# Altium PCB PCB1.PcbDoc
Units mil, origin at the board's own origin, x right, y up, seen from the top; angles counter-clockwise.
Board outline 2756.19 x 2794.09 mil, 2 copper layers (Top Layer, Bottom Layer); 70 components, 41 nets, 180 pads, 117 vias.
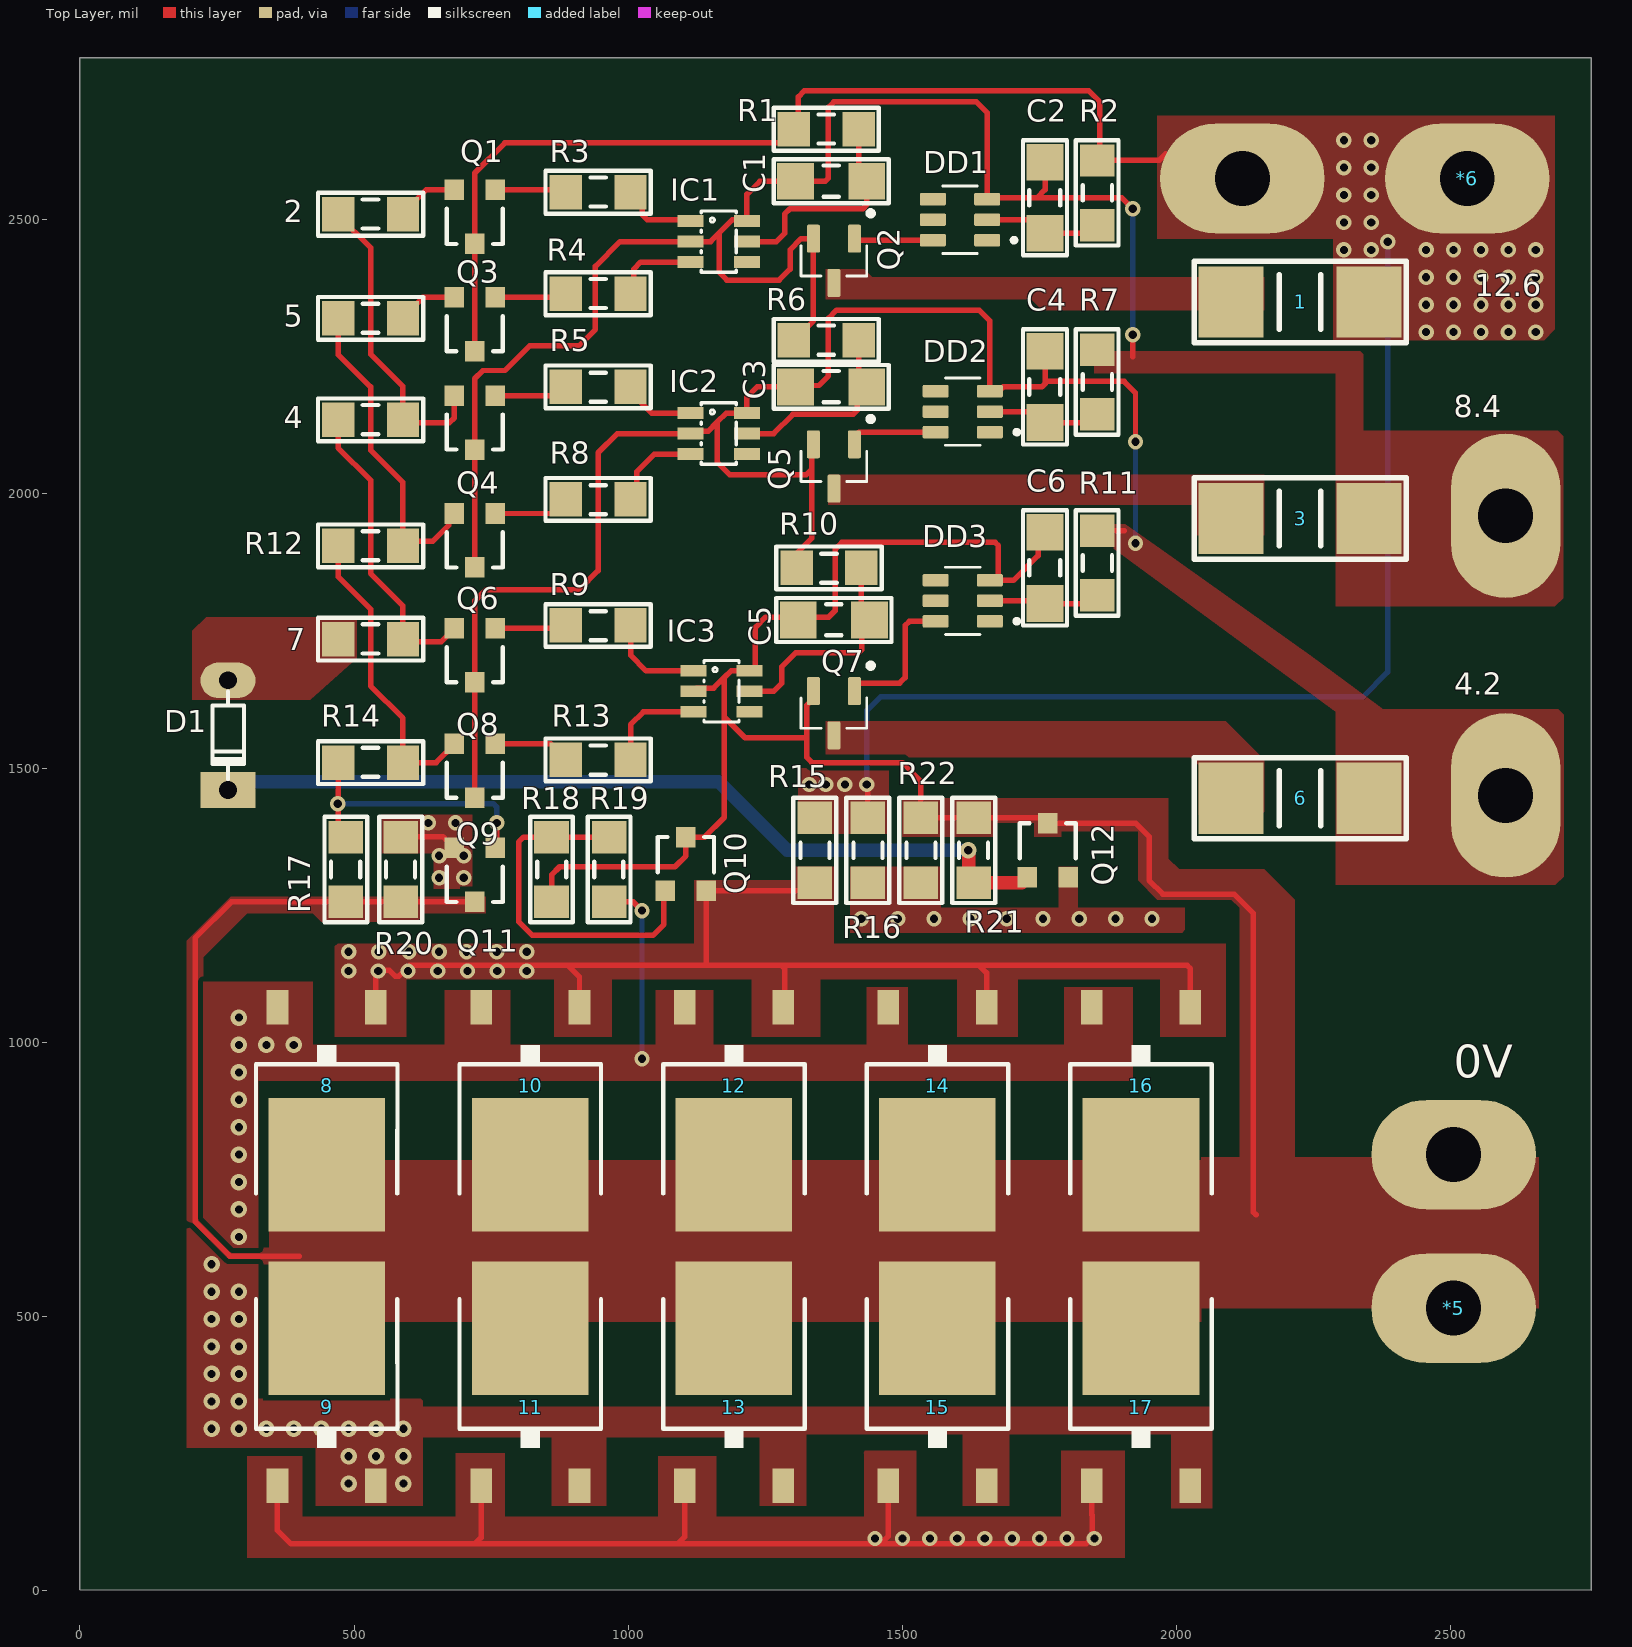
[diagram p0: Top Layer view]
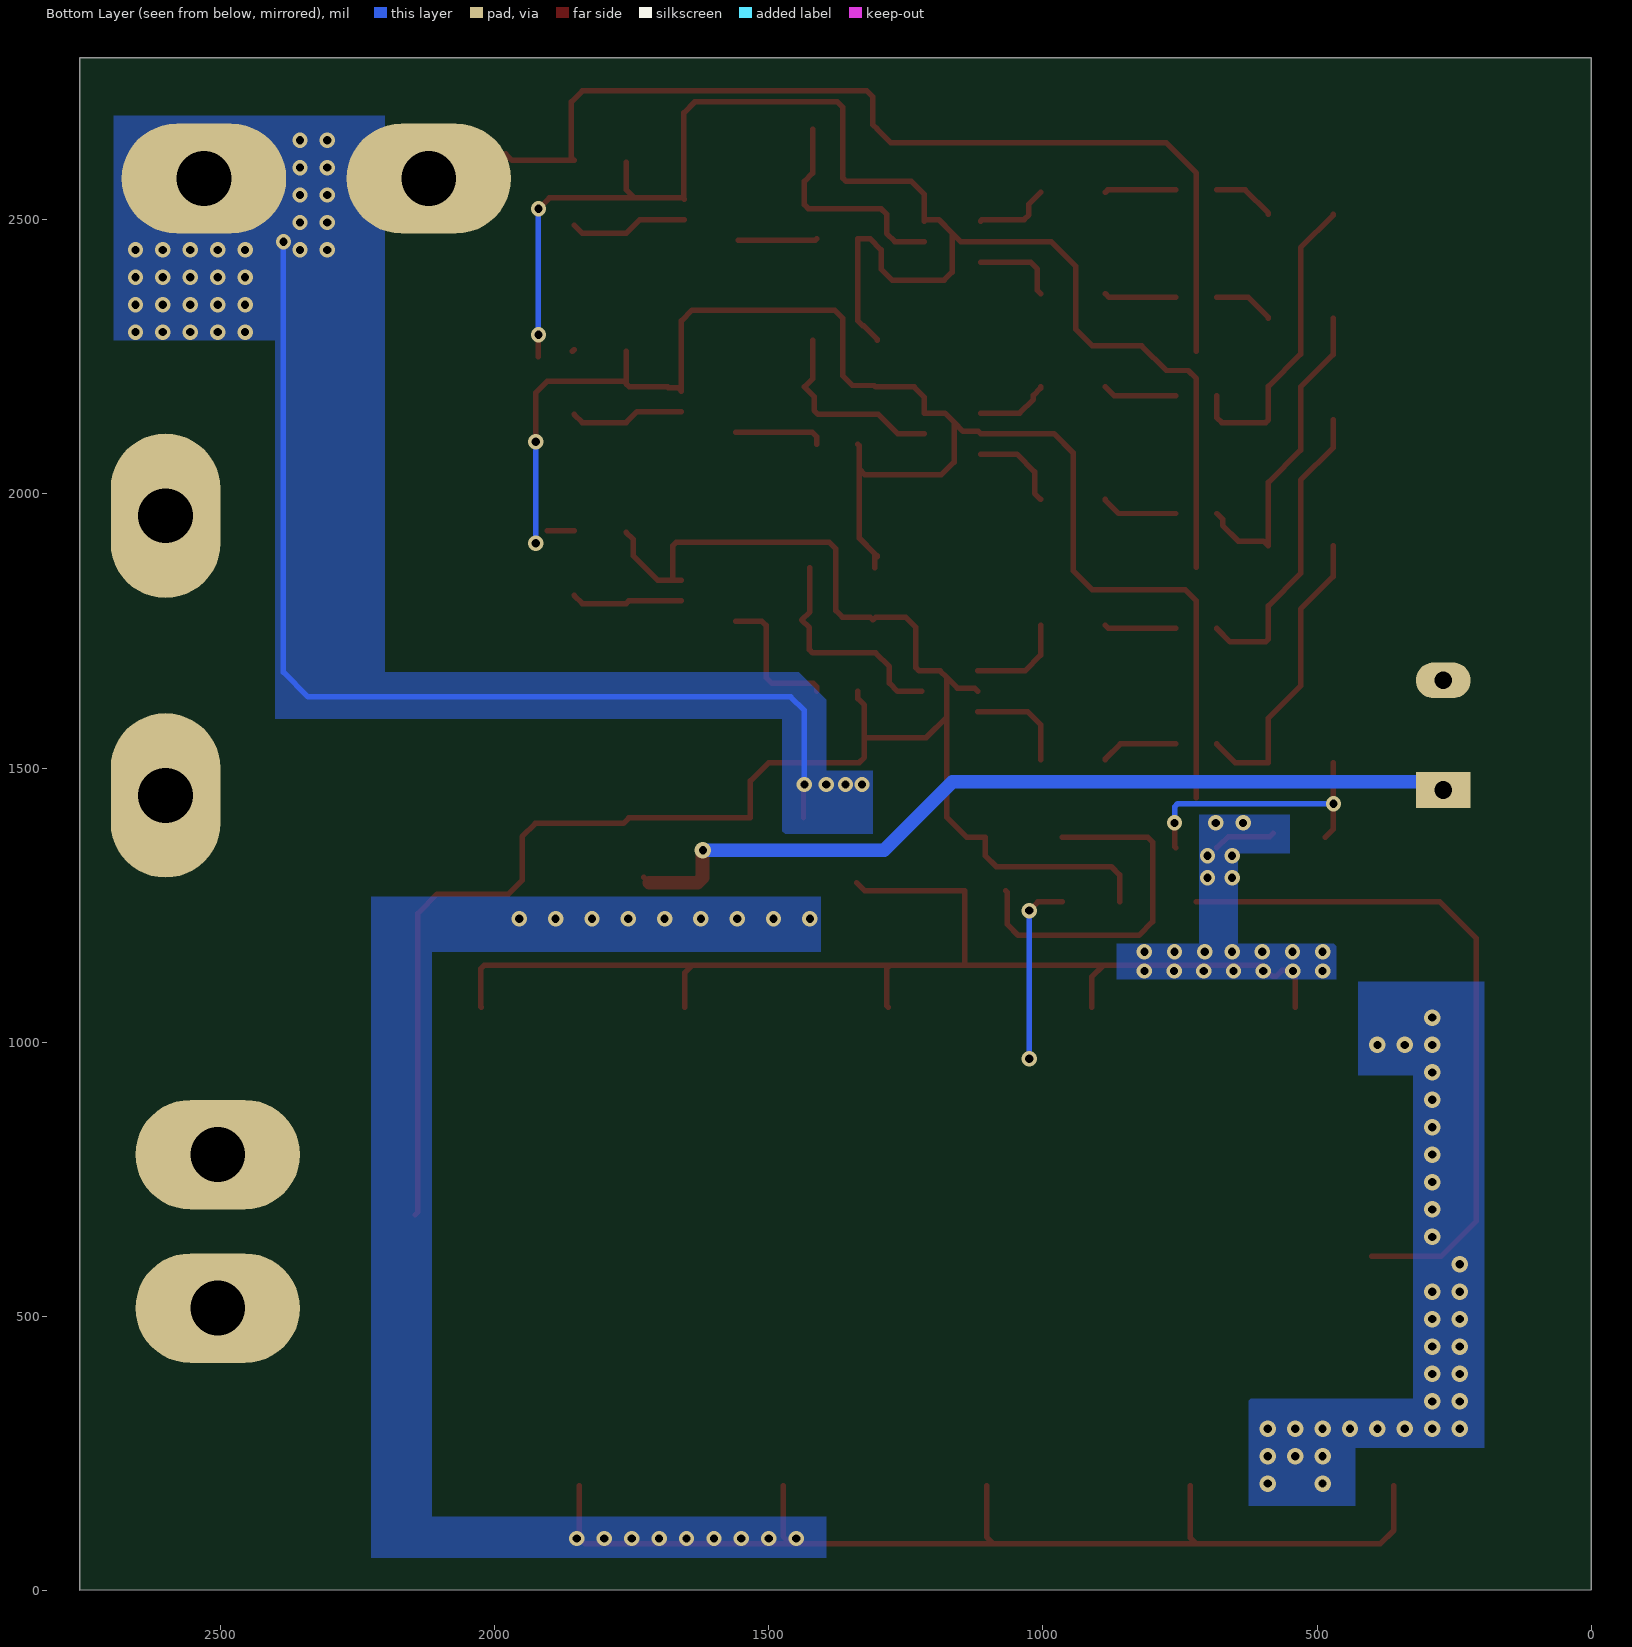
[diagram p1: Bottom Layer view, seen from below]
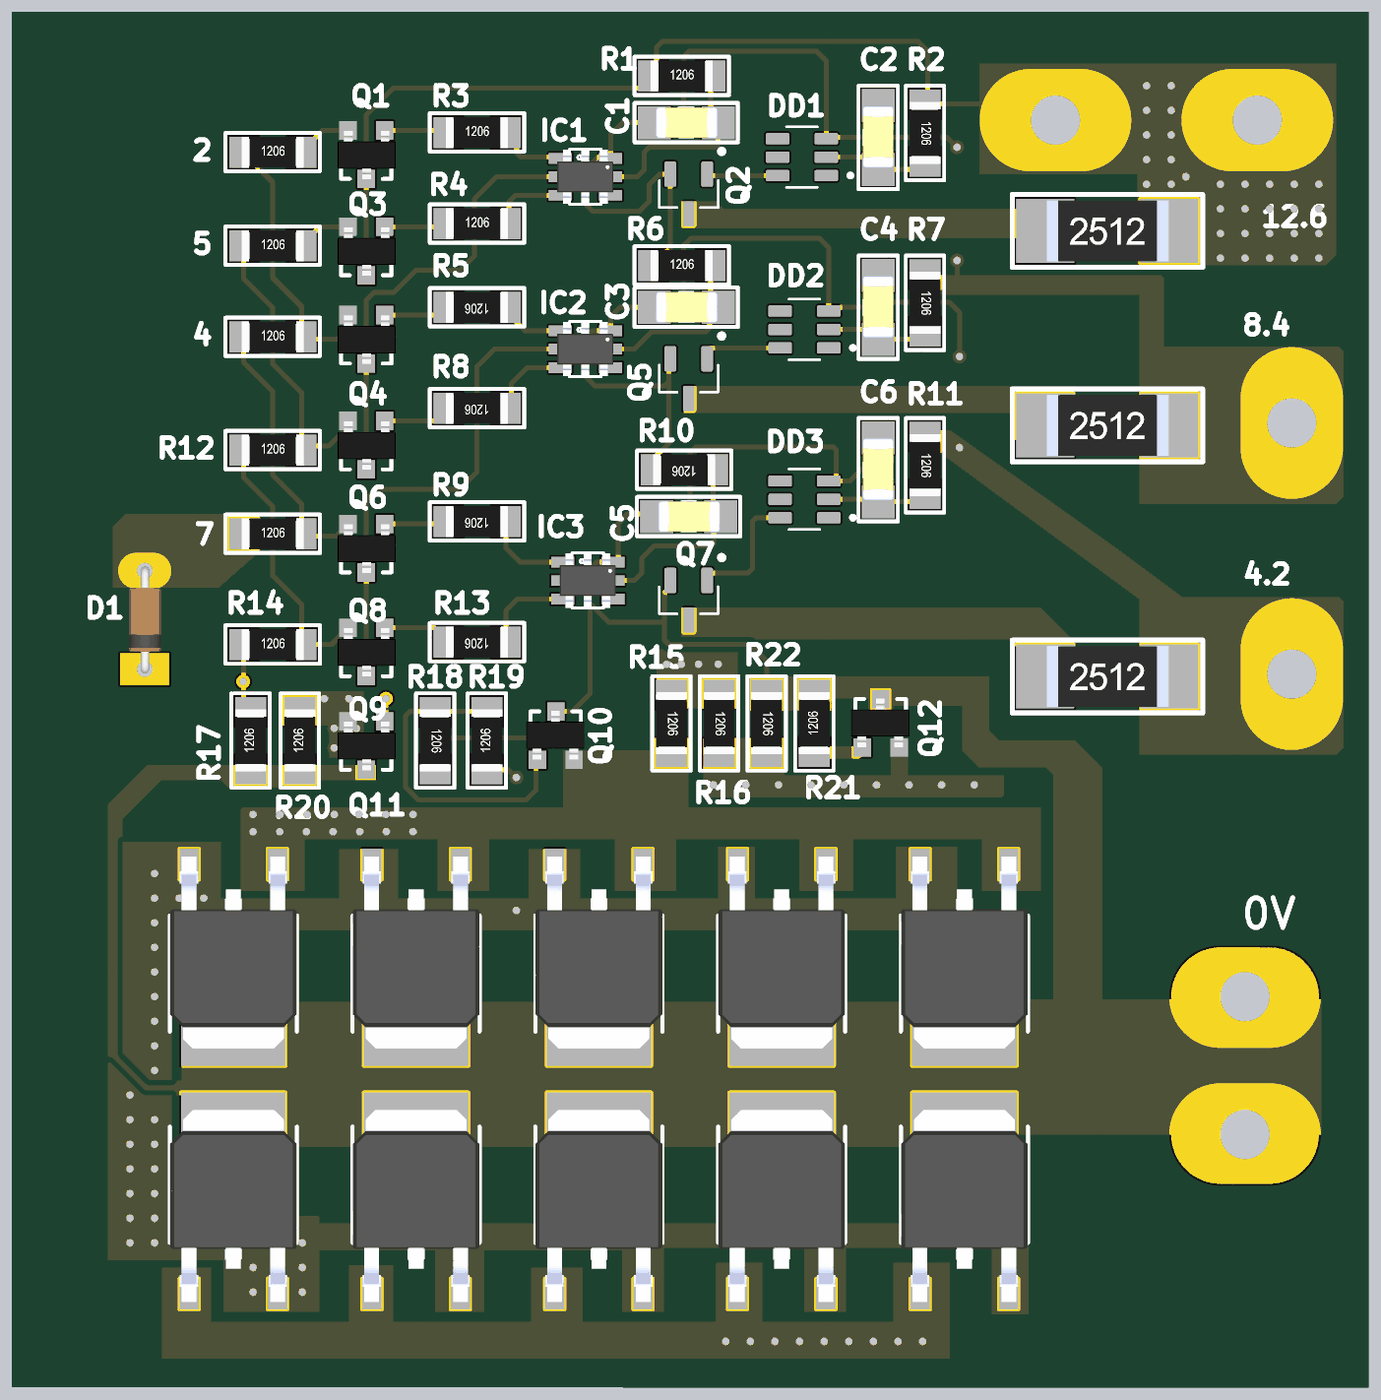
[diagram p2: 3D render of the assembled board from above, using the file's embedded part models]

## Layer stack, top to bottom
Top Solder: solder mask 0.4, Solder Resist, Dk 3.5
Top Layer: signal copper 1.4
Dielectric 1: dielectric 12.6, FR-4, Dk 4.8
Bottom Layer: signal copper 1.4
Bottom Solder: solder mask 0.4, Solder Resist, Dk 3.5

## Board outline
0,1.69 0,2795 2756.19,2795 2756.19,0.91

## Design rules (kind name [scope] priority, off if disabled: settings)
Clearance [All] p1: gap=10 ignorepadtopadclearanceinfootprint=FALSE except(0: Arc-Hole Track-Hole SMDPad-Hole THPad-Hole Via-Hole Fill-Hole Poly-Hole Region-Hole Text-Hole)
HoleSize [All] p1: absolutevalues=TRUE maxlimit=200 minlimit=15 maxpercent=80.000 minpercent=20.000
MinimumSolderMaskSliver [All] p1 off: minsoldermaskwidth=10
PlaneClearance [All] p1: clearance=50
PlaneConnect [All] p1: planeconnectstyle=Direct reliefexpansion=20 reliefentries=4 reliefconductorwidth=10 reliefairgap=10
PolygonConnect [All] p1: connectstyle=Direct reliefconductorwidth=10 reliefentries=4 polygonreliefangle="90 Angle" airgapwidth=10
RoutingVias [All] p1: holewidth=28 width=50 viastyle="Through Hole" minholewidth=28 minwidth=50 maxholewidth=28 maxwidth=50
SilkToSilkClearance [All] p1 off: silktosilkclearance=10
SilkToSolderMaskClearance [IsPad] p1 off: minsilkscreentomaskgap=10 clearancetoexposedcopper=TRUE
SolderMaskExpansion [All] p1: expansion=4 istentingtop=FALSE
Width [All] p1: maxlimit=100 minlimit=10 preferedwidth=10
24 further rules are at their usual default settings.

## Components (designator, comment, footprint, x,y, rotation, side; value= is the part's Value field where it differs from the comment)
0V "Component_1" PCBComponent_1 2505,795 r0 top (schematic designator *4)
1 "100R" "tro smd 2512" 2225,2350 r0 top
2 "1M" "tro smd 1206" 530,2510 r0 top
3 "100R" "tro smd 2512" 2225,1955 r0 top
4 "1M" "tro smd 1206" 530,2135 r0 top
4.2 "Component_1" PCBComponent_1 2600,1450 r90 top (schematic designator *3)
5 "1M" "tro smd 1206" 530,2320 r0 top
6 "100R" "tro smd 2512" 2225,1445 r0 top
7 "1M" "tro smd 1206" 530,1735 r0 top
8 "IRFR3711TRPBF" TO252 450,875 r180 top
8.4 "Component_1" PCBComponent_1 2600,1960 r90 top (schematic designator *2)
9 "IRFR3711TRPBF" TO252 450,380 r0 top
10 "IRFR3711TRPBF" TO252 821.25,875 r180 top
11 "IRFR3711TRPBF" TO252 821.25,380 r0 top
12 "IRFR3711TRPBF" TO252 1192.5,875 r180 top
12.6 "Component_1" PCBComponent_1 2120,2575 r180 top (schematic designator *1)
13 "IRFR3711TRPBF" TO252 1192.5,380 r0 top
14 "IRFR3711TRPBF" TO252 1563.75,875 r180 top
15 "IRFR3711TRPBF" TO252 1563.75,380 r0 top
16 "IRFR3711TRPBF" TO252 1935,875 r180 top
17 "IRFR3711TRPBF" TO252 1935,380 r0 top
*5 "Component_1" PCBComponent_1 2505,515 r0 top
*6 "Component_1" PCBComponent_1 2530,2575 r0 top
C1 "0.1u" "tu 1206" 1370,2570 r0 top
C2 "0.1u" "tu 1206" 1760,2540 r90 top
C3 "0.1u" "tu 1206" 1370,2195 r0 top
C4 "0.1u" "tu 1206" 1760,2195 r90 top
C5 "0.1u" "tu 1206" 1375,1770 r0 top
C6 "0.1u" "tu 1206" 1760,1865 r90 top
D1 "100v" "DIODE 0.5A" 270,1560 r90 top
DD1 "HY2213" SOT23-6#1 1605,2500 r180 top
DD2 "HY2213" SOT23-6#1 1610,2150 r180 top
DD3 "HY2213" SOT23-6#1 1610,1805 r180 top
IC1 "DW01A" SOT23-6#2 1165,2460 r270 top
IC2 "DW01A" SOT23-6#2 1165,2110 r270 top
IC3 "DW01A" SOT23-6#2 1170,1640 r270 top
Q1 "BA" SOT23 720,2505 r180 top
Q2 "SI2308CDS-T1-GE3" SOT95P237X112-3N 1375,2425 r270 top
Q3 "BA" SOT23 720,2309.21 r180 top
Q4 "BA" SOT23 720,2130 r180 top
Q5 "SI2308CDS-T1-GE3" SOT95P237X112-3N 1375,2050 r270 top
Q6 "BA" SOT23 720,1915 r180 top
Q7 "SI2308CDS-T1-GE3" SOT95P237X112-3N 1375,1600 r270 top
Q8 "BA" SOT23 720,1705.79 r180 top
Q9 "BA" SOT23 720,1495 r180 top
Q10 "HF" SOT23 1105,1325 r0 top value=C9014
Q11 "HF" SOT23 720,1305 r180 top value=C9014
Q12 "" SOT23 1765,1350 r0 top value=C9014
R1 "100R" "tro smd 1206" 1361,2665 r0 top
R2 "100R" "tro smd 1206" 1855,2549 r270 top
R3 "510K" "tro smd 1206" 945,2550 r0 top
R4 "510K" "tro smd 1206" 945,2365 r0 top
R5 "510K" "tro smd 1206" 945,2195 r180 top
R6 "100R" "tro smd 1206" 1361,2280 r0 top
R7 "100R" "tro smd 1206" 1855,2204 r270 top
R8 "510K" "tro smd 1206" 945,1990 r180 top
R9 "510K" "tro smd 1206" 945,1760 r180 top
R10 "100R" "tro smd 1206" 1366,1865 r180 top
R11 "100R" "tro smd 1206" 1855,1874 r270 top
R12 "1M" "tro smd 1206" 530,1905 r0 top
R13 "510K" "tro smd 1206" 945,1515 r180 top
R14 "1M" "tro smd 1206" 530,1510 r0 top
R15 "1M" "tro smd 1206" 1340,1350 r270 top
R16 "1M" "tro smd 1206" 1436.67,1350 r270 top
R17 "1M" "tro smd 1206" 485,1315 r90 top
R18 "1M" "tro smd 1206" 860,1315 r270 top
R19 "1M" "tro smd 1206" 965,1315 r90 top
R20 "10M" "tro smd 1206" 585,1315 r90 top
R21 "1M" "tro smd 1206" 1630,1350 r90 top
R22 "10M" "tro smd 1206" 1533.33,1350 r270 top

## Footprints (in the part's own frame and the unit in brackets; to place one, negate y for a bottom-side part, rotate by r counter-clockwise, add the part's x,y. Pads: shape width x height; smd on the part's side, far side on the other; paste and mask are expansions set on the pad)
"DIODE 0.5A" [mil] "Diode muoi, xung"
  oval 65x100 hole 32: 1(100,0)
  rect 65x100 hole 32: 2(-100,0)
  silkscreen extent -80,-30 80,28, body extent -108,-33 108,32, height 61
PCBComponent_1 [mil]
  oval 300x200 hole 100: 0(0,0)
SOT23 [mm] "SOT23"
  rect 0.9x0.95 smd: 1(-0.95,-1.25) 2(0,1.25)
  rect 0.9x0.95 smd mask+0: 3(0.95,-1.25)
  silkscreen extent -1.3,-0.38 1.3,1.25, body extent -1.52,-1.23 1.48,1.27, height 1.06
SOT23-6#1 [mm]
  rrect25% 1.21x0.58 smd: 1(-1.255,0.95) 2(-1.255,0) 3(-1.255,-0.95) 4(1.255,-0.95) 5(1.255,0) 6(1.255,0.95)
  silkscreen extent -2.6,-1.56 0.8,1.56
SOT23-6#2 [mm]
  rect 0.55x1.2 smd: 1(-0.95,-1.3) 2(0,-1.3) 3(0.95,-1.3) 4(0.95,1.3) 5(0,1.3) 6(-0.95,1.3)
  silkscreen extent -1.42,-0.81 1.42,0.81, body extent -1.4,-1.45 1.4,1.45, height 1.45
SOT95P237X112-3N [mm]
  rrect25% 1.3x0.6 smd: 1(-1.025,0.95) 2(-1.025,-0.95) 3(1.025,0)
  silkscreen extent -2.32,-1.52 0.7,1.82
TO252 [mm]
  rect 1x1.6 smd: 1(-2.28,-4.8) 2(2.28,-4.8)
  rect 5.4x6.2 smd: 3(0,2.5)
  silkscreen extent -3.28,-3.03 3.28,3.84, body extent -3.27,-5.21 3.27,4.7, height 2.39
"tro smd 1206" [mm]
  rect 1.5x1.6 smd: 1(-1.5,0) 2(1.5,0)
  silkscreen extent -2.44,-0.99 2.44,0.99, body extent -1.6,-0.8 1.6,0.8, height 0.6
"tro smd 2512" [mm]
  rect 3x3.3 smd: 1(-3.2,0) 2(3.2,0)
  silkscreen extent -4.9,-1.88 4.93,1.88, body extent -3.12,-1.57 3.18,1.58, height 0.82
"tu 1206" [mm]
  rect 1.7x1.7 smd: 1(-1.65,0) 2(1.65,0)
  silkscreen extent -2.67,-1.02 2.67,1.02, body extent -1.57,-0.8 1.63,0.8, height 0.94

## Part data
1 3 6: library part "Tro 2512 5% 100R", "Dán", Chung_Loai=Dán, Don_Vi=Con, Ma_Hang=MH007974, So_Chan=2, Ten_Linh_Kien="Trở 2512 5% 101-100R"
2 4 5 7 R1 R2 R3 R4 R5 R6 R7 R8 R9 R10 R11 R12 R13 R14 R15 R16 R17 R18 R19 R20 R21 R22: library part "Tro 1206 1% 0.68R", "Dán", Chung_Loai=Dán, Don_Vi=Con, Ma_Hang=MH008104, So_Chan=2, Ten_Linh_Kien="Trở 1206 1% 0.68R"
8 9 10 11 12 13 14 15 16 17: "N-Channel 20V 100A _Tc_ 2.5W _Ta_, 120W _Tc_ Surface Mount D-Pak", Package="TO-252 Infineon", Availability=Unavailable, MF=Infineon, MP=IRFR3711TRPBF, Price=None, SnapEDA_Link=https://www.snapeda.com/parts/IRFR3711TRPBF/Infineon%20Technologies/view-part/760733/?ref=snap
C1 C2 C3 C4 C5 C6: library part "Tu 1206 4.7nF 50V", "Dán", Chung_Loai=Dán, Don_Vi=Con, Ma_Hang=MH007538, So_Chan=2, Ten_Linh_Kien="Tụ 1206 4.7nF 50V NPO"
D1: library part "Diode 1N4148", "Cắm", Chung_Loai=Cắm, Don_Vi=Con, Ma_Hang=MH001065, Ten_Linh_Kien="Diode 1N4148 DO35 450mA 100V ( 1N4148 DIP)"
DD1 DD2 DD3: "1 Cell Li-ion/Polymer Battery Charge Balance IC"
IC1 IC2 IC3: "One Cell Lithium-ion/Polymer Battery Protection IC", Package="SOT-23-6 Fortune Semiconductor", Availability="Not in stock", Check_prices=https://www.snapeda.com/parts/DW01A/Fortune+Semiconductor/view-part/?ref=eda, MF="Fortune Semiconductor", MP=DW01A, Price=None, SnapEDA_Link=https://www.snapeda.com/parts/DW01A/Fortune+Semiconductor/view-part/?ref=snap
Q1 Q3 Q4 Q6 Q8 Q9: library part "A1015 BA SMD", "PNP 600mW, ECB"
Q2 Q5 Q7: "N-Channel 60V 2.6A (Tc) 1.6W (Tc) Surface Mount SOT-23-3 (TO-236)", Package="SOT-23-3 Vishay Siliconix", Availability=Unavailable, MF="Vishay Siliconix", MP=SI2308CDS-T1-GE3, Price=None, SnapEDA_Link=https://www.snapeda.com/parts/SI2308CDS-T1-GE3/Vishay%20Siliconix/view-part/2523766/?ref=snap
Q10 Q11 Q12: library part "C1815 HF SMD", "NPN transistor"

## Via types
v1: diameter 28, hole 15, Top Layer to Bottom Layer, tented both sides, 79 vias
v2: diameter 30, hole 15, Top Layer to Bottom Layer, tented both sides, 36 vias
v3: diameter 28, hole 15, Top Layer to Bottom Layer, 2 vias

## Nets (pads, with @x,y where several pads share a name; then routed paths per layer and width w, separated by ;. In a path a pad name is that pad's centre, name@x,y a point inside that pad or via, vN(x,y) a via of type N, cw(c..) or ccw(c..) an arc to the next point about the centre after c; other vN are vias at no path point)
0V: 0V.0 8.3 9.3 10.3 11.3 12.3 13.3 14.3 15.3 16.3 17.3 *5.0 C5.1 C6.2 DD3.3 IC3.2 IC3.6 Q7.2 Q10.2 Q11.2 Q12.2 R17.1 R18.2 R20.1 R21.2 R22.1 | length 4818.4
  Top Layer w10: 400,610 273.28,610 210,673.28 210,1190 275.94,1255.94 R17.1 R20.1 585.16,1255.79 Q11.2 ; R18.2 860,1305 875,1320 1085,1320 1105,1340 Q10.2 1139.21,1374.21 1175,1410 1175,1593.12 ; IC3.2 1124.65,1645.83 1155.83,1645.83 1175,1665 ; Q7.2 1337.6,1626.57 1325.57,1614.55 1325.57,1555.24 ; DD3.3 DD3.3@1674.95,1842.4 ; C6.2 1747.35,1917.31 1747.35,1887.35 1702.4,1842.4 DD3.3@1674.95,1842.4 ; 2145,685 2140,690 2140,1235 2105,1270 1975,1270 1950,1295 1950,1375 1925.79,1399.21 Q12.2 1755.16,1409.06 R21.2 R22.1 1533.33,1476.67 1500,1510 1335,1510 1325.57,1519.43 1325.57,1555.24 ; 1175,1593.12 1175,1665 ; 1175,1593.12 1212.88,1555.24 1325.57,1555.24 ; 1175,1665 1187.4,1677.4 IC3.6 1225.93,1677.4 1231.76,1683.23 1231.76,1756.42 1250.57,1775.24 1304.8,1775.24 C5.1 1315.28,1775.24 1365.57,1775.24 1377.44,1787.11 1377.44,1899.63 1389.31,1911.5 1669.14,1911.5 1675,1905.64 1675,1844.04 1674.16,1843.19 DD3.3@1674.95,1842.4
4.2V: 4.2.0 6.2 C3.1 C4.2 DD2.3 IC2.2 IC2.6 Q5.2 Q8.2 Q9.2 R10.2 R11.1 | length 3020.3
  Top Layer w10: Q9.2 Q8.2 720,1805 740,1825 910,1825 945,1860 945,2075 980,2110 IC2.2 1117.87,2114.05 1145.43,2114.05 1162.11,2130.72 ; R10.2@1301.94,1885 R10.2@1301.94,1886.97 ; R10.2 1306.94,1891.19 1335,1919.24 1335,2045 ; Q5.2 1335,2087.76 1335,2045 ; 1760,2205 1904.14,2205 1925,2184.14 v1(1925,2095) ; C4.2 1760,2200.86 1754.14,2195 1684.09,2195 1682.91,2193.82 1665.83,2193.82 DD2.3 1659.41,2315.59 1640,2335 1380,2335 1365,2320 1365,2215 1347.65,2197.65 1307.69,2197.65 C3.1 1235,2195 1216.18,2176.18 IC2.6 1178.79,2147.4 1162.11,2130.72 ; R11.1 1904.14,1933.06 ; 1162.11,2130.72 1162.11,2057.89 1185,2035 1325,2035 1335,2045
  Bottom Layer w10: v1(1925,1910) v1(1925,2095)
8.4V: 3.2 8.4.0 C1.1 C2.2 DD1.3 IC1.2 IC1.6 Q2.2 Q4.2 Q6.2 R6.1 R7.1 | length 2949.9
  Top Layer w10: Q6.2 Q4.2 720,2210 735,2225 775,2225 820,2270 910,2270 940,2300 940,2415 985,2460 IC1.2 1150,2460 1165.47,2475.47 ; R6.1 1301.94,2281.97 1326.47,2306.5 1328.44,2306.5 1337.6,2315.65 Q2.2 1315.35,2465.35 1295,2445 1295,2410 1275,2390 1180,2390 1165.47,2404.53 1165.47,2475.47 ; DD1.3 DD1.3@1655,2537.99 ; C2.2 1760,2555 1745,2540 ; R7.1 R7.1@1858.06,2260 ; 1920,2250 v1(1920,2290) ; v1(1920,2520) 1900,2540 1745,2540 ; 1165.47,2475.47 1190,2500 1213.58,2500 IC1.6 1216.18,2546.18 1240,2570 C1.1 1359.14,2570 1365,2575.86 1365,2705 1375,2715 1635,2715 1655,2695 DD1.3@1655,2537.99 ; DD1.3@1655,2537.99 1657.01,2540 1745,2540
  Bottom Layer w10: v1(1920,2290) v1(1920,2520)
12.6V: 1.2 12.6.0 *6.0 Q1.2 Q3.2 R1.1 R2.1 R15.1 R16.1 | length 3761.2
  Top Layer w10: Q3.2 Q1.2 720,2585 775,2640 1277.42,2640 1301.94,2664.53 R1.1 1310,2673.06 1310,2724.14 1320.86,2735 1840,2735 1860,2715 1860,2613.06 R2.1 1968.06,2608.06 1980,2620 ; R16.1 v1@1436.67,1466.67
  Bottom Layer w10: v1(1435,1470) 1435,1605 1460,1630 2340,1630 2385,1675 v1(2385,2460)
  other v1: 1330,1470 1360,1470 1395,1470 2455,2295 2505,2295 2555,2295 2605,2295 2655,2295 2455,2345 2505,2345 2555,2345 2605,2345 2655,2345 2455,2395 2505,2395 2555,2395 2605,2395 2655,2395 2305,2445 2355,2445 2455,2445 2505,2445 2555,2445 2605,2445 2655,2445 2305,2495 2355,2495 2305,2545 2355,2545 2305,2595 2355,2595 2305,2645 2355,2645
Net1_1: 1.1 Q2.3
Net2_1: 2.1 4.2 Q4.3 | length 563.6
  Top Layer w10: 2.1 470.94,2508.03 530,2448.98 530,2255 589.06,2195.94 4.2 594.06,2130 673.81,2130 682.6,2138.79 Q4.3
Net2_2: 2.2 Q1.3 | length 113
  Top Layer w10: 2.2 589.06,2511.97 631.3,2554.21 Q1.3
Net3_1: 3.1 Q5.3
Net4_1: 4.1 7.2 Q8.3 | length 555.5
  Top Layer w10: 4.1 470.94,2084.06 530,2025 530,1855 589.06,1795.94 7.2 594.06,1730 658.58,1730 682.6,1754.02 Q8.3
Net5_1: 5.1 Q6.3 R12.2 | length 588.8
  Top Layer w10: 5.1 470.94,2254.06 530,2195 530,2080 589.06,2020.94 R12.2 597.84,1913.79 643.79,1913.79 672.38,1942.38 672.38,1954 Q6.3
Net5_2: 5.2 Q3.3 | length 110.6
  Top Layer w10: 5.2 589.06,2321.97 625.51,2358.43 Q3.3
Net6_1: 6.1 Q7.3
Net7_1: 7.1 D1.1
Net8_1: 8.1 10.1 12.1 14.1 16.1 Q10.3 Q11.3 R15.2 R20.2 | length 2335.1
  Top Layer w10: 8.1 539.76,1124.76 546,1131 564.13,1131 575.13,1120 581.01,1120 601.01,1140 890,1140 ; R20.2@580,1380.94 585.94,1375 661.81,1375 671.4,1365.41 672.38,1365.41 682.6,1355.2 Q11.3 ; 10.1 911.01,1118.99 890,1140 ; 12.1 1285,1066.71 1285,1134.14 1279.14,1140 ; R15.2 1324.84,1275.79 Q10.3 1142.4,1142.6 1145,1140 ; 14.1 1653.51,1126.49 1640,1140 ; 16.1 2025,1064.21 2025,1134.14 2019.14,1140 1640,1140 ; 890,1140 1145,1140 ; 1145,1140 1279.14,1140 ; 1279.14,1140 1640,1140
  other v1: 490,1130 544.17,1130 598.33,1130 652.5,1130 706.67,1130 760.83,1130 815,1130 490,1165 545,1165 600,1165 655,1165 705,1165 760,1165 815,1165 655,1300 700,1300 655,1340 700,1340 635,1400 685,1400
Net8_2: 8.2 9.2 10.2 11.2 12.2 13.2 14.2 15.2 16.2 17.2 R19.1 | length 336.6
  Top Layer w10: R19.1 1009.06,1255.94 v1(1025,1240)
  Bottom Layer w10: v1(1025,970) v1(1025,1240)
  other v2: 490,195 590,195 490,245 540,245 590,245 240,295 290,295 340,295 390,295 440,295 490,295 540,295 590,295 240,345 290,345 240,395 290,395 240,445 290,445 240,495 290,495 240,545 290,545 240,595 290,645 290,695 290,745 290,795 290,845 290,895 290,945 290,995 340,995 390,995 290,1045
Net9_1: 9.1 11.1 13.1 15.1 17.1 Q12.3 R16.2 R22.2 | length 2011
  Top Layer w10: 9.1 360.24,109.76 385,85 720,85 ; 11.1 731.49,96.49 720,85 ; 13.1 1102.74,97.74 1090,85 ; 15.1 1473.99,98.99 1460,85 ; 17.1 1845.24,138 1845.86,137.38 1845.86,95.86 1835,85 1460,85 ; 720,85 1090,85 ; 1090,85 1460,85
  other v1: 1450,95 1500,95 1550,95 1600,95 1650,95 1700,95 1750,95 1800,95 1850,95 1425,1225 1491.25,1225 1557.5,1225 1623.75,1225 1690,1225 1756.25,1225 1822.5,1225 1888.75,1225 1955,1225
NetC1_2: C1.2 IC1.5 R1.2 | length 411
  Top Layer w10: IC1.5 1270,2460 1285,2475 1285,2510 1295,2520 1427.65,2520 1434.96,2527.31 C1.2 1420.06,2584.91 R1.2
NetC2_1: C2.1 DD1.2 R2.2 | length 217.1
  Top Layer w10: DD1.2 1735.04,2500 C2.1 1840.09,2475.04 R2.2
NetC3_2: C3.2 IC2.5 R6.2 | length 359.8
  Top Layer w10: IC2.5 1265,2110 1300,2145 1410,2145 1417.39,2152.39 1417.39,2177.43 C3.2 1420.06,2209.91 R6.2
NetC4_1: C4.1 DD2.2 R7.2 | length 210
  Top Layer w10: DD2.2 1740.04,2150 C4.1 1840.09,2130.04 R7.2
NetC5_2: C5.2 IC3.5 R10.1 | length 414.8
  Top Layer w10: IC3.5 1265,1640 1280,1655 1280,1685 1305,1710 1420,1710 1425.86,1715.86 1425.86,1755.9 C5.2 1425.06,1784.91 R10.1
NetC6_1: C6.1 DD3.2 R11.2 | length 203.8
  Top Layer w10: DD3.2 1755.04,1805 C6.1 1840.09,1800.04 R11.2
NetD1_2: D1.2 Q12.1 R21.1 | length 1578
  Top Layer w10: v2@1620,1344.9 v2(1620,1350) ; Q12.1@1717.76,1290.94 Q12.1
  Top Layer w25: v2(1620,1350) 1620.96,1349.04 1620.96,1299.99 R21.1 Q12.1@1717.76,1290.94
  Bottom Layer w25: D1.2 285,1475 1165,1475 1290,1350 v2(1620,1350)
NetDD1_6: DD1.6 Q2.1 | length 144.3
  Top Layer w10: Q2.1 1415.16,2462.6 DD1.6
NetDD2_6: DD2.6 Q5.1 | length 165.5
  Top Layer w10: Q5.1 1412.4,2104.13 1420.87,2112.6 DD2.6
NetDD3_6: DD3.6 Q7.1 | length 261.1
  Top Layer w10: Q7.1 1412.4,1648.19 1419.21,1655 1495,1655 1505,1665 1505,1760 1512.6,1767.6 DD3.6
NetIC1_1: IC1.1 R3.2 | length 143
  Top Layer w10: R3.2 1025.69,2528.37 1025.69,2508.79 1034.47,2500 1111.22,2500 IC1.1
NetIC1_3: IC1.3 R4.2 | length 156.5
  Top Layer w10: R4.2 1010,2370.94 1010,2410 1022.6,2422.6 IC1.3
NetIC2_1: IC2.1 R5.1 | length 134.8
  Top Layer w10: R5.1 1004.06,2193.03 1017.5,2179.59 1017.5,2172.5 1042.6,2147.4 IC2.1
NetIC2_3: IC2.3 R8.1 | length 166.9
  Top Layer w10: R8.1 1015,2000.94 1015,2040 1047.6,2072.6 IC2.3
NetIC3_1: IC3.1 R9.1 | length 180.6
  Top Layer w10: R9.1 1004.06,1705.94 1032.6,1677.4 IC3.1
NetIC3_3: IC3.3 R13.1 | length 188.6
  Top Layer w10: R13.1 1004.06,1579.06 1027.6,1602.6 IC3.3
NetQ1_1: Q1.1 R3.1 | length 130.3
  Top Layer w10: Q1.1 881.73,2554.21 R3.1
NetQ3_1: Q3.1 R4.1 | length 131.3
  Top Layer w10: Q3.1 879.37,2358.43 R4.1
NetQ4_1: Q4.1 R5.2 | length 135.1
  Top Layer w10: Q4.1 870.16,2179.21 R5.2
NetQ6_1: Q6.1 R8.2 | length 140.4
  Top Layer w10: Q6.1 862.13,1964.21 885.94,1988.03 R8.2
NetQ8_1: Q8.1 R9.2 | length 130.6
  Top Layer w10: Q8.1 880.94,1755 R9.2
NetQ9_1: Q9.1 R13.2 | length 141.8
  Top Layer w10: Q9.1 858.7,1544.21 885.94,1516.97 R13.2
NetQ9_3: Q9.3 R12.1 R14.2 | length 552.2
  Top Layer w10: R12.1 470.94,1849.06 530,1790 530,1650 589.06,1590.94 R14.2 649.37,1510 682.6,1543.23 Q9.3
NetQ10_1: Q10.1 R18.1 R19.2 | length 659.3
  Top Layer w10: R19.2 R18.1 809.06,1374.06 800,1365 800,1220 825,1195 1045,1195 1065,1215 1065,1273.19 Q10.1
NetQ11_1: Q11.1 R14.1 R17.2 | length 510.2
  Top Layer w10: R14.1 470.94,1388.11 R17.2 ; Q11.1 760,1356.81 v3(760,1400)
  Bottom Layer w10: v3(470,1435) 754.14,1435 760,1429.14 v3(760,1400)
pads on no net: DD1.1 DD1.4 DD1.5 DD2.1 DD2.4 DD2.5 DD3.1 DD3.4 DD3.5 IC1.4 IC2.4 IC3.4

## Polygon pours and split planes (outlines as drawn)
0V on Top Layer "0V_L01_P039" (solid, pour order 39): 740,1265 740,1235 620,1235 620,1225 615,1220 440,1220 425,1235 305,1235 225.02,1155.02 225.29,679.62 279.91,625 410,625 410,590 405,585 395.29,594.71 263.03,594.71 195,662.74 195,1185 275,1265
Net8_1 on Top Layer "NET8_1_L01_P038" (solid, pour order 38): 550,1345 550,1415 715,1415 715,1410 715,1405 715,1280 645,1280 645,1345
Net9_1 on Top Layer "NET9_1_L01_P033" (solid, pour order 33): 1785,1320 1820,1320 1820,1240 1785,1240
Net9_1 on Top Layer "NET9_1_L01_P032" (solid, pour order 32): 1405,1245 1405,1200 2010,1200 2015,1205 2015,1245
Net9_1 on Top Layer "NET9_1_L01_P031" (solid, pour order 31): 1405,1320 1405,1240 1570,1240 1570,1320
12.6V on Top Layer "12.6V_L01_P027" (solid, pour order 27): 1310,1380 1475,1380 1475,1500 1310,1500
0V on Top Layer "0V_L01_P029" (solid, pour order 29): 1500,1445 1500,1375 1665,1375 1665,1395 1670,1400 1740,1400 1740,1375 1790,1375 1790,1385 1930,1385 1930,1295 1965,1260 2100,1260 2115,1245 2115,785 2215,785 2215,1260 2160,1315 2005,1315 1985,1335 1985,1445
Net8_1 on Top Layer "NET8_1_L01_P028" (solid, pour order 28): 1375,1320 1375,1135 1120,1135 1120,1295 1305,1295 1305,1320
Net1_1 on Top Layer "NET1_1_L01_P026" (solid, pour order 26): 1360,2410 1430,2410 1445,2395 2160,2395 2160,2335 1755,2335 1735,2355 1360,2355
Net3_1 on Top Layer "NET3_1_L01_P023" (solid, pour order 23): 1365,2035 1365,1980 2035,1980 2035,1925 2160,1925 2160,2035
Net6_1 on Top Layer "NET6_1_L01_P022" (solid, pour order 22): 1360,1520 2025,1520 2040,1505 2040,1415 2155,1415 2160,1420 2160,1515 2090,1585 1360,1585
0V on Top Layer "0V_L01_P021" (solid, pour order 21): 2044.54,790 2660,790 2660,515 2645,515 2044.54,515
8.4V on Top Layer "8.4V_L01_P010" (solid, pour order 10): 1850,2220 2290,2220 2290,2115 2295,2110 2340,2110 2340,2255 2335,2260 1850,2260
Net8_2 on Top Layer "NET8_2_L01_P018" (solid, pour order 18): 405,1095 405,995 665,995 665,1095 785,1095 785,995 1050,995 1050,1095 1155,1095 1155,995 1435,995 1435,1100 1510,1100 1510,995 1795,995 1795,1100 1920,1100 1920,930 1875,930 300,930 300,1095
Net8_2 on Top Layer "NET8_2_L01_P020" (solid, pour order 20): 624.87,155 430,155 430,260 195,260 195,1110 425,1110 425,1005 425,940 325,940 325,350 625,350
Net8_1 on Top Layer "NET8_1_L01_P013" (solid, pour order 13): 465,1010 595,1010 595,1115 865,1115 865,1010 970,1010 970,1115 1225,1115 1225,1010 1350,1010 1350,1115 1600,1115 1600,1010 1710,1010 1710,1115 1970,1115 1970,1010 2090,1010 2090,1180 470,1180 465,1175
Net8_2 on Top Layer "NET8_2_L01_P016" (solid, pour order 16): 470,155 625,155 625,280 860,280 860,155 960,155 960,280 1240,280 1240,155 1325,155 1325,285 1610,285 1610,155 1695,155 1695,285 1990,285 1990,150 2065,150 2065,335 470,335
0V on Top Layer "0V_L01_P015" (solid, pour order 15): 345,490 461.57,490 2045,490 2045,785 345,785
Net9_1 on Top Layer "NET9_1_L01_P014" (solid, pour order 14): 405,245 405,135 685,135 685,250 775,250 775,135 1055,135 1055,245 1160,245 1160,135 1430,135 1430,250 1425,255 1525,255 1525,135 1790,135 1790,255 1905,255 1905,60 305,60 305,245
4.2V on Top Layer "tga" (solid, pour order 12): 2455.47,1548.85 2245,1705 1970,1900 1906.54,1945 1885,1945 1885,1900 2338.16,1566.84
4.2V on Top Layer "4.2V_L01_P009" (solid, pour order 9): 2290.64,1606.78 2695.64,1606.78 2705.64,1596.78 2705.64,1301.78 2690.64,1286.78 2290.64,1286.78
8.4V on Top Layer "8.4V_L01_P008" (solid, pour order 8): 2290,2115 2695,2115 2705,2105 2705,1810 2690,1795 2290,1795
12.6V on Top Layer "12.6V_L01_P007" (solid, pour order 7): 2285.88,2280 2670,2280 2690,2300 2690,2480 2285.88,2480
12.6V on Top Layer "12.6V_L01_P003" (solid, pour order 3): 1965,2465 2675,2465 2690,2480 2690,2690 2185,2690 1965,2690
Net7_1 on Top Layer "NET7_1_L01_P000" (solid, pour order 0): 205,1640 205,1635 205,1750 230,1775 505,1775 505,1700 420,1625 205,1625 205,1645
12.6V on Bottom Layer "12.6V_L02_P030" (solid, pour order 30): 2400,2690 2400,1590 1475,1590 1475,1385 1470,1380 1310,1380 1310,1495 1395,1495 1395,1625 1445,1675 2200,1675 2200,2690
Net8_1 on Bottom Layer "NET8_1_L02_P037" (solid, pour order 37): 465,1115 865,1115 865,1180 470,1180 465,1175
Net8_1 on Bottom Layer "NET8_1_L02_P036" (solid, pour order 36): 550,1345 640,1345 645,1345 645,1115 715,1115 715,1415 625,1415 550,1415
12.6V on Bottom Layer "12.6V_L02_P035" (solid, pour order 35): 2365,2280 2695,2280 2695,2690 2689.37,2690 2685,2690 2365,2690
Net9_1 on Bottom Layer "NET9_1_L02_P034" (solid, pour order 34): 1395,135 2115,135 2115,1165 1405,1165 1405,1265 2225,1265 2225,60 1395,60
Net8_2 on Bottom Layer "NET8_2_L02_P019" (solid, pour order 19): 624.87,155 430,155 430,260 195,260 195,1110 425,1110 425,1005 425,940 325,940 325,350 625,350

## Silkscreen, mask and mechanical layers (free items; w line width, h text height)
Mechanical 1:
  lines w39.37: 0,1.69 0,2795 2756.19,2795 2756.19,0.91 0.29,0.91